# EAGLE board C64_2 (EAGLE 5.12), part 1 of 2
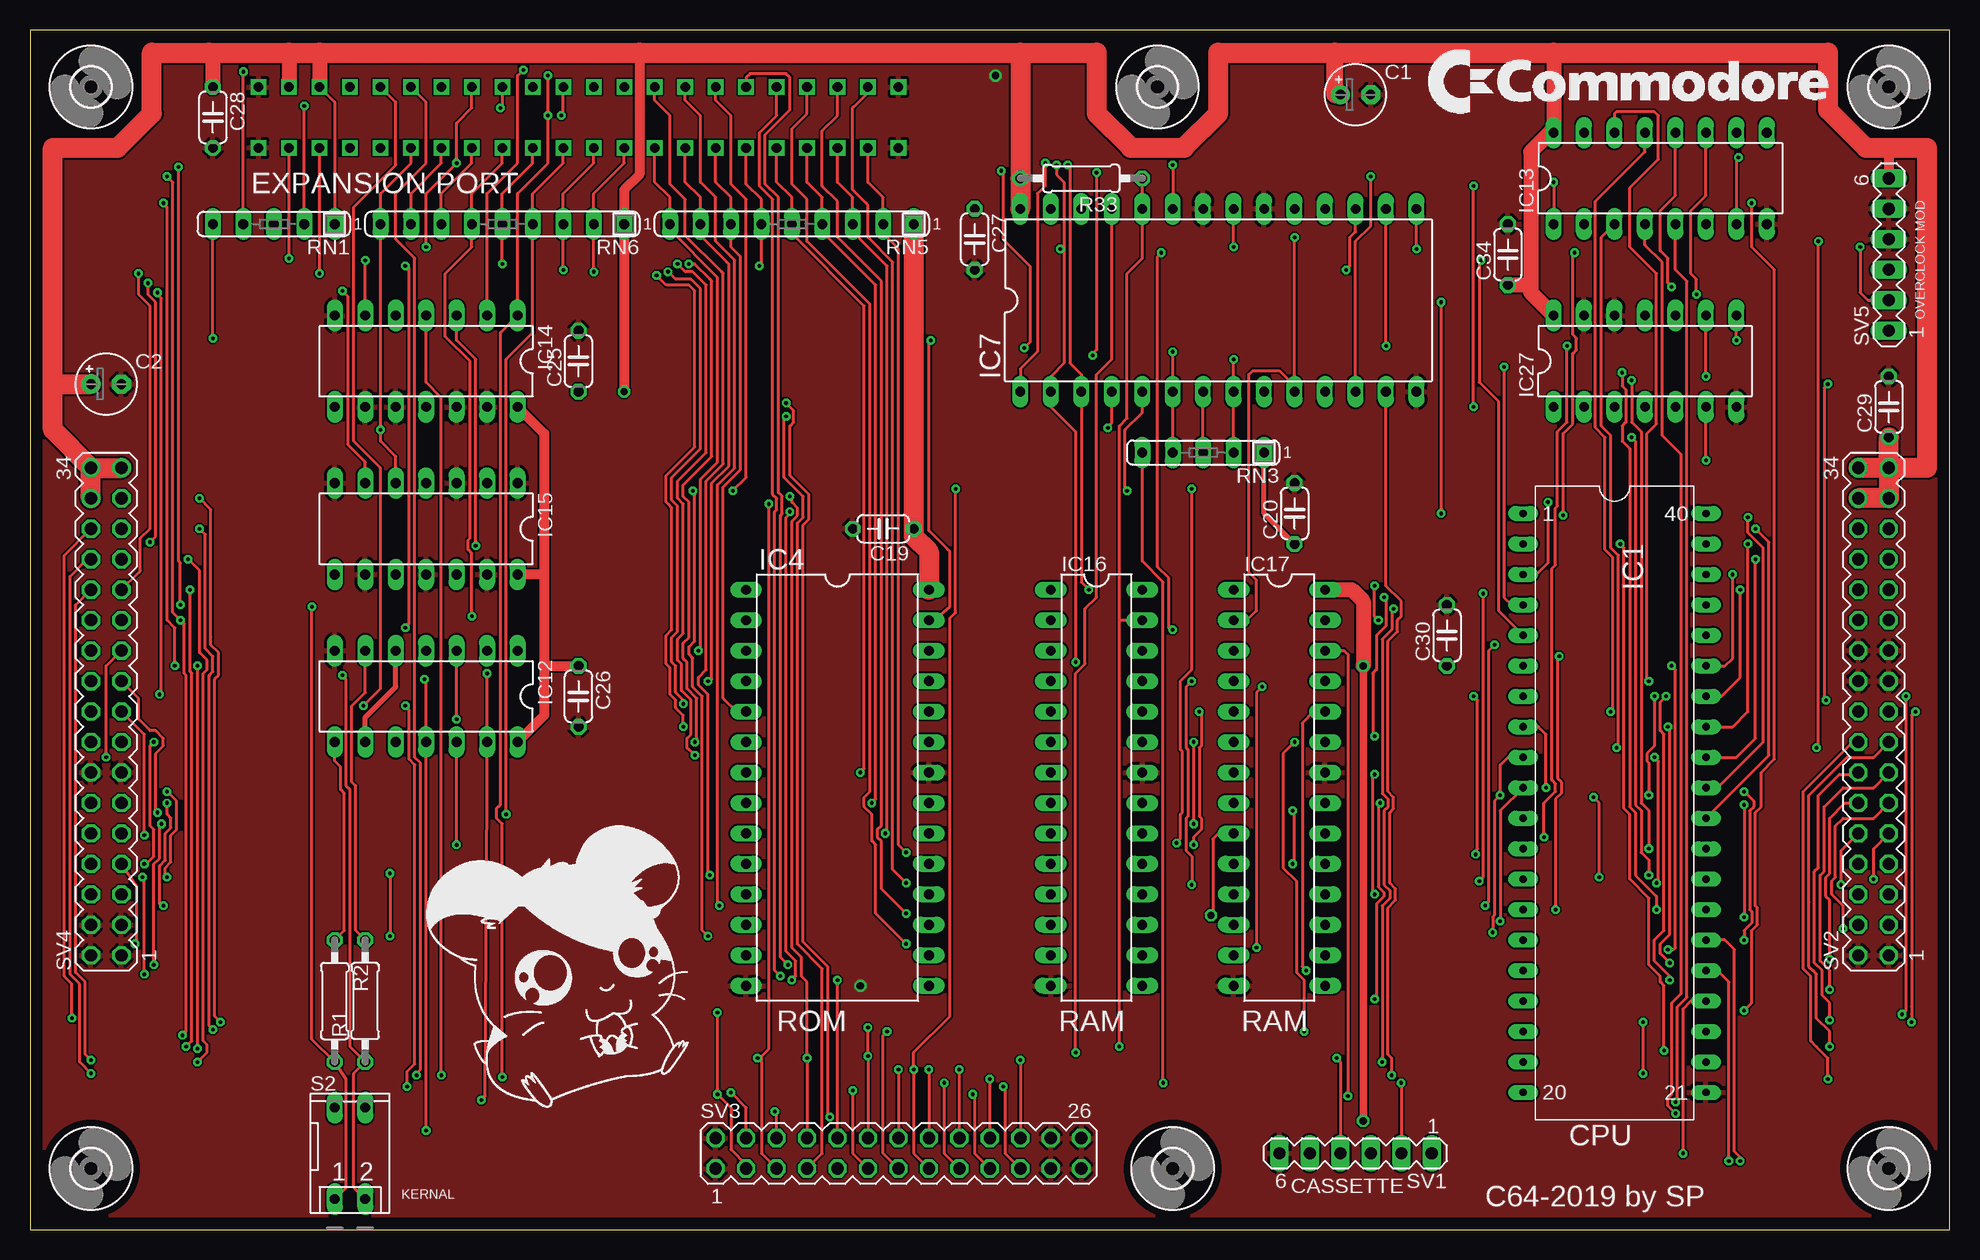
[diagram p0: board, top side]
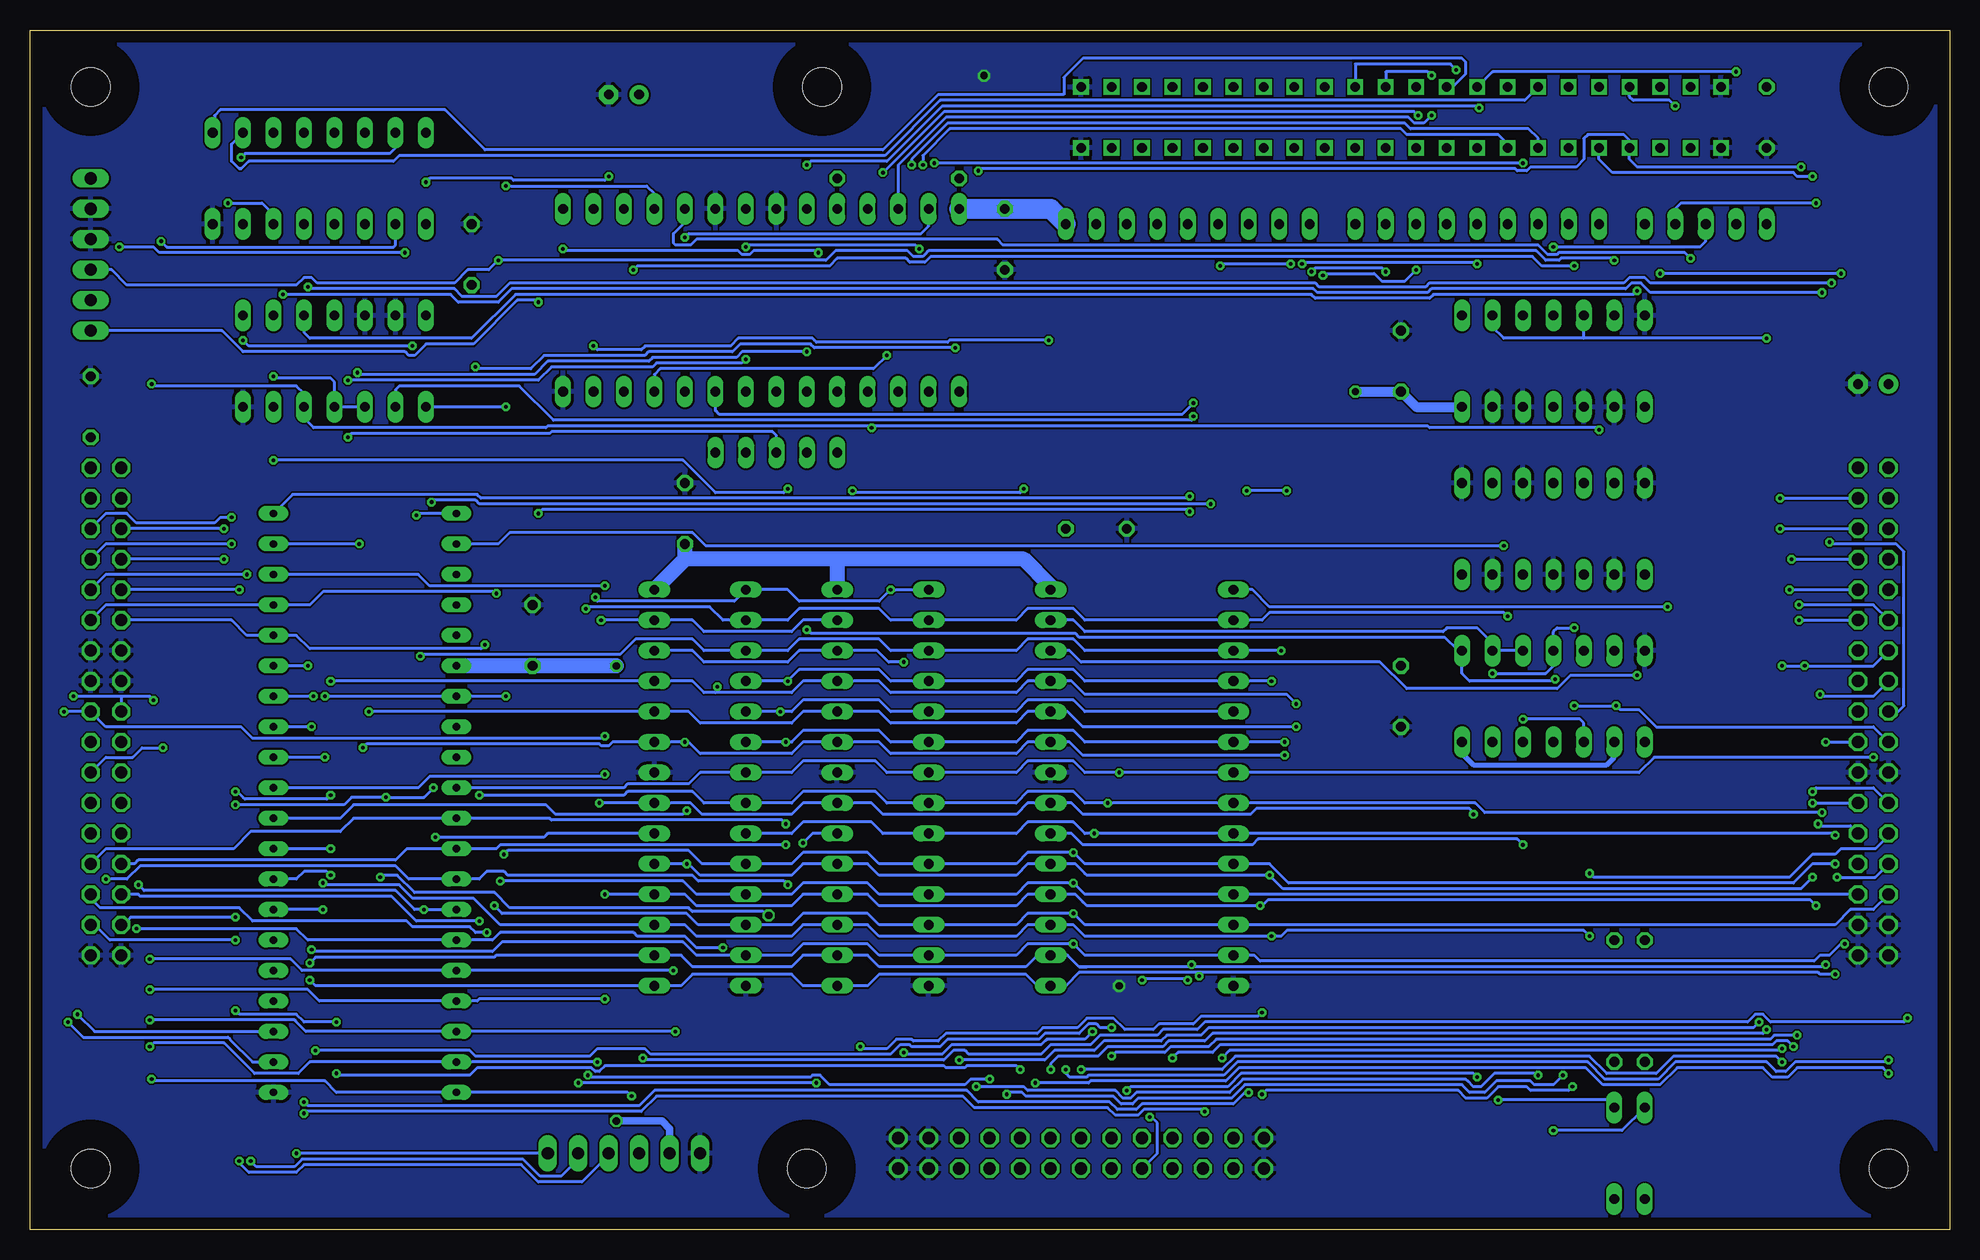
[diagram p1: board, bottom side, seen from below]

Size 160 x 100 mm. Coordinates in mm from the lower left corner, seen from the top.
Outline: 0,0 160,0 160,100 0,100 0,0
Copper layers (1*16): Top 0.035mm / dielectric 1.5mm / Bottom 0.035mm
Design rules "default *": minimum track width 10mil, minimum drill 12mil, track to track 6mil, track to pad 6mil, pad to pad 6mil, via to via 6mil, smd to smd 6mil, copper to edge 40mil, drill to drill 8mil, minimum pad ring 10mil, minimum via ring 8mil, stop-mask expansion 4mil, vias tented up to drill 0mil, thermal gap 10mil

## Footprints (pad centres in the part's own frame; a part is rotated, then mirrored left to right if it is on the bottom)
E2,5-5 = drill 0.813 pad 1.6 round: + -1.27,0 | drill 0.813 pad 1.6 octagon: - 1.27,0
C050-024X044 = drill 0.813 octagon: 1 -2.54,0; 2 2.54,0
EXPANSIONPORT = drill 0.8 square: 1 -26.67,2.54; 2 -24.13,2.54; 3 -21.59,2.54; 4 -19.05,2.54; 5 -16.51,2.54; 6 -13.97,2.54; 7 -11.43,2.54; 8 -8.89,2.54; 9 -6.35,2.54; 10 -3.81,2.54; 11 -1.27,2.54; 12 1.27,2.54; 13 3.81,2.54; 14 6.35,2.54; 15 8.89,2.54; 16 11.43,2.54; 17 13.97,2.54; 18 16.51,2.54; 19 19.05,2.54; 20 21.59,2.54; 21 24.13,2.54; 22 26.67,2.54; A -26.67,-2.54; B -24.13,-2.54; C -21.59,-2.54; D -19.05,-2.54; E -16.51,-2.54; F -13.97,-2.54; H -11.43,-2.54; J -8.89,-2.54; K -6.35,-2.54; L -3.81,-2.54; M -1.27,-2.54; N 1.27,-2.54; P 3.81,-2.54; R 6.35,-2.54; S 8.89,-2.54; T 11.43,-2.54; U 13.97,-2.54; V 16.51,-2.54; W 19.05,-2.54; X 21.59,-2.54; Y 24.13,-2.54; Z 26.67,-2.54
DIP40 = drill 0.61 pad 1.27 long: 1 -24.13,-7.62; 2 -21.59,-7.62; 3 -19.05,-7.62; 4 -16.51,-7.62; 5 -13.97,-7.62; 6 -11.43,-7.62; 7 -8.89,-7.62; 8 -6.35,-7.62; 9 -3.81,-7.62; 10 -1.27,-7.62; 11 1.27,-7.62; 12 3.81,-7.62; 13 6.35,-7.62; 14 8.89,-7.62; 15 11.43,-7.62; 16 13.97,-7.62; 17 16.51,-7.62; 18 19.05,-7.62; 19 21.59,-7.62; 20 24.13,-7.62; 21 24.13,7.62; 22 21.59,7.62; 23 19.05,7.62; 24 16.51,7.62; 25 13.97,7.62; 26 11.43,7.62; 27 8.89,7.62; 28 6.35,7.62; 29 3.81,7.62; 30 1.27,7.62; 31 -1.27,7.62; 32 -3.81,7.62; 33 -6.35,7.62; 34 -8.89,7.62; 35 -11.43,7.62; 36 -13.97,7.62; 37 -16.51,7.62; 38 -19.05,7.62; 39 -21.59,7.62; 40 -24.13,7.62
DIL28 = drill 0.813 long: 1 -16.51,-7.62; 2 -13.97,-7.62; 3 -11.43,-7.62; 4 -8.89,-7.62; 5 -6.35,-7.62; 6 -3.81,-7.62; 7 -1.27,-7.62; 8 1.27,-7.62; 9 3.81,-7.62; 10 6.35,-7.62; 11 8.89,-7.62; 12 11.43,-7.62; 13 13.97,-7.62; 14 16.51,-7.62; 15 16.51,7.62; 16 13.97,7.62; 17 11.43,7.62; 18 8.89,7.62; 19 6.35,7.62; 20 3.81,7.62; 21 1.27,7.62; 22 -1.27,7.62; 23 -3.81,7.62; 24 -6.35,7.62; 25 -8.89,7.62; 26 -11.43,7.62; 27 -13.97,7.62; 28 -16.51,7.62
DIL14 = drill 0.813 long: 1 -7.62,-3.81; 2 -5.08,-3.81; 3 -2.54,-3.81; 4 0,-3.81; 5 2.54,-3.81; 6 5.08,-3.81; 7 7.62,-3.81; 8 7.62,3.81; 9 5.08,3.81; 10 2.54,3.81; 11 0,3.81; 12 -2.54,3.81; 13 -5.08,3.81; 14 -7.62,3.81
DIL16 = drill 0.813 long: 1 -8.89,-3.81; 2 -6.35,-3.81; 3 -3.81,-3.81; 4 -1.27,-3.81; 5 1.27,-3.81; 6 3.81,-3.81; 7 6.35,-3.81; 8 8.89,-3.81; 9 8.89,3.81; 10 6.35,3.81; 11 3.81,3.81; 12 1.27,3.81; 13 -1.27,3.81; 14 -3.81,3.81; 15 -6.35,3.81; 16 -8.89,3.81
DIL28-3 = drill 0.813 long: 1 -16.51,-3.81; 2 -13.97,-3.81; 3 -11.43,-3.81; 4 -8.89,-3.81; 5 -6.35,-3.81; 6 -3.81,-3.81; 7 -1.27,-3.81; 8 1.27,-3.81; 9 3.81,-3.81; 10 6.35,-3.81; 11 8.89,-3.81; 12 11.43,-3.81; 13 13.97,-3.81; 14 16.51,-3.81; 15 16.51,3.81; 16 13.97,3.81; 17 11.43,3.81; 18 8.89,3.81; 19 6.35,3.81; 20 3.81,3.81; 21 1.27,3.81; 22 -1.27,3.81; 23 -3.81,3.81; 24 -6.35,3.81; 25 -8.89,3.81; 26 -11.43,3.81; 27 -13.97,3.81; 28 -16.51,3.81
0207/10 = drill 0.813 octagon: 1 -5.08,0; 2 5.08,0
SIL5 = drill 0.813 long: 1 -5.08,0; 2 -2.54,0; 3 0,0; 4 2.54,0; 5 5.08,0
SIL9 = drill 0.813 long: 1 -10.16,0; 2 -7.62,0; 3 -5.08,0; 4 -2.54,0; 5 0,0; 6 2.54,0; 7 5.08,0; 8 7.62,0; 9 10.16,0
DP-02 = drill 0.813 long: 1 -1.27,-3.81; 2 1.27,-3.81; 3 1.27,3.81; 4 -1.27,3.81
MA06-1 = drill 1.016 long: 1 -6.35,0; 2 -3.81,0; 3 -1.27,0; 4 1.27,0; 5 3.81,0; 6 6.35,0
MA17-2 = drill 1.016 octagon: 1 -20.32,-1.27; 2 -20.32,1.27; 3 -17.78,-1.27; 4 -17.78,1.27; 5 -15.24,-1.27; 6 -15.24,1.27; 7 -12.7,-1.27; 8 -12.7,1.27; 9 -10.16,-1.27; 10 -10.16,1.27; 11 -7.62,-1.27; 12 -7.62,1.27; 13 -5.08,-1.27; 14 -5.08,1.27; 15 -2.54,-1.27; 16 -2.54,1.27; 17 0,-1.27; 18 0,1.27; 19 2.54,-1.27; 20 2.54,1.27; 21 5.08,-1.27; 22 5.08,1.27; 23 7.62,-1.27; 24 7.62,1.27; 25 10.16,-1.27; 26 10.16,1.27; 27 12.7,-1.27; 28 12.7,1.27; 29 15.24,-1.27; 30 15.24,1.27; 31 17.78,-1.27; 32 17.78,1.27; 33 20.32,-1.27; 34 20.32,1.27
MA13-2 = drill 1.016 octagon: 1 -15.24,-1.27; 2 -15.24,1.27; 3 -12.7,-1.27; 4 -12.7,1.27; 5 -10.16,-1.27; 6 -10.16,1.27; 7 -7.62,-1.27; 8 -7.62,1.27; 9 -5.08,-1.27; 10 -5.08,1.27; 11 -2.54,-1.27; 12 -2.54,1.27; 13 0,-1.27; 14 0,1.27; 15 2.54,-1.27; 16 2.54,1.27; 17 5.08,-1.27; 18 5.08,1.27; 19 7.62,-1.27; 20 7.62,1.27; 21 10.16,-1.27; 22 10.16,1.27; 23 12.7,-1.27; 24 12.7,1.27; 25 15.24,-1.27; 26 15.24,1.27
3,2 = hole 3.2: 0,0

## Placement (x,y rotation side)
C1  10µ  [E2,5-5]  110.49,94.61 0 top
C2  10µ  [E2,5-5]  6.35,70.48 0 top
C19  100n  [C050-024X044]  71.12,58.42 180 top
C20  100n  [C050-024X044]  105.41,59.69 90 top
C25  100n  [C050-024X044]  45.72,72.39 90 top
C26  100n  [C050-024X044]  45.72,44.45 270 top
C27  100n  [C050-024X044]  78.74,82.55 270 top
C28  100n  [C050-024X044]  15.24,92.71 270 top
C29  100n  [C050-024X044]  154.94,68.58 90 top
C30  100n  [C050-024X044]  118.11,49.53 90 top
C34  100n  [C050-024X044]  123.19,81.28 90 top
CN1  EXPANSIONPORT-C64  [EXPANSIONPORT]  45.72,92.71 0 top
IC1  6510 CPU  [DIP40]  132.08,35.56 270 top
IC4  27C512  [DIL28]  67.31,36.83 270 top
IC7  27C512  [DIL28]  99.06,77.47 0 top
IC12  74HC11  [DIL14]  33.02,44.45 180 top
IC13  74HC139  [DIL16]  135.89,87.63 0 top
IC14  74HC08  [DIL14]  33.02,72.39 180 top
IC15  74HC04  [DIL14]  33.02,58.42 180 top
IC16  61256  [DIL28-3]  88.9,36.83 270 top
IC17  61256  [DIL28-3]  104.14,36.83 270 top
IC27  74HC32  [DIL14]  134.62,72.39 0 top
R1  3K3  [0207/10]  27.94,19.05 90 top
R2  3K3  [0207/10]  25.4,19.05 270 top
R33  1K5  [0207/10]  87.63,87.63 180 top
RN1  3K3  [SIL5]  20.32,83.82 180 top
RN3  3K3  [SIL5]  97.79,64.77 180 top
RN5  3K3  [SIL9]  63.5,83.82 180 top
RN6  3K3  [SIL9]  39.37,83.82 180 top
S2  KERNAL  [DP-02]  26.67,6.35 0 top
SV1  CASS  [MA06-1]  110.49,6.35 180 top
SV2  [MA17-2]  153.67,43.18 90 top
SV3  [MA13-2]  72.39,6.35 0 top
SV4  [MA17-2]  6.35,43.18 90 top
SV5  [MA06-1]  154.94,81.28 90 top
U$1  [3,2]  5.08,95.25 0 top
U$2  [3,2]  5.08,5.08 0 top
U$3  [3,2]  154.94,5.08 0 top
U$4  [3,2]  154.94,95.25 0 top
U$5  [3,2]  93.98,95.25 0 top
U$6  [3,2]  95.25,5.08 0 top

## Library data of the parts
C1 C2 C19 C20 C25-C30 C34 R1 R2 R33 = rcl
CN1 = 0RB_Commodore
IC1 = 0RB_65xx
IC4 IC7 = memory
IC12-IC15 IC27 = 74xx-us
IC16 IC17 = memory-hitachi; OC_FARNELL: unknown; OC_NEWARK: unknown
RN1 RN3 RN5 RN6 = resistor-sil; OC_FARNELL: unknown; OC_NEWARK: unknown
S2 = switch-dil; MPN: MCDP02; OC_FARNELL: 1255233; OC_NEWARK: 26M1095
SV1-SV5 = con-lstb; OC_FARNELL: unknown; OC_NEWARK: unknown
U$1-U$6 = holes

## Nets
/A15: IC15.6 IC27.10
/AEC: IC7.25 SV3.13
/BA: CN1.12 IC7.26 IC14.1 SV3.11
/BASIC: IC7.17 IC12.4 IC12.13 S2.3
/CAS: IC7.9 SV3.9
/CASRAM: IC7.18 IC27.1
/CHAREN: IC1.27 IC7.6 RN3.4
/CHAROM: IC7.15 IC12.1 IC12.11 S2.4
/CIA1: IC13.12 SV4.18
/CIA2: IC13.11 SV4.20
/CIAS: IC13.7 IC13.15
/COLOR: IC13.6 SV3.18
/CS_HIRAM: IC17.20 IC27.8
/CS_LORAM: IC16.20 IC27.6
/DMA: CN1.13 IC14.2 IC14.5 RN1.5
/EXROM: CN1.9 IC7.23 RN1.4
/GAME: CN1.8 IC7.1 RN1.3
/HIRAM: IC1.28 IC7.7 RN3.3
/IRQ: CN1.4 IC1.3 RN1.2 SV3.5 SV4.22
/KERNAL: IC4.27 IC7.16 IC12.2 IC12.3 IC12.10
/LORAM: IC1.29 IC7.8 RN3.2
/NMI: CN1.D IC1.4 SV4.24
/RAS: IC27.2 SV3.7
/RAS_CAS: IC27.3 IC27.4 IC27.9
/RESET: CN1.C IC1.40 SV3.8 SV4.25
/ROM_CS: IC4.20 IC12.12
/ROMH: CN1.B IC7.19
/ROML: CN1.11 IC7.11
/SID: IC13.5 SV3.4
/SRQ_IN: SV1.4 SV4.30
/VA14: IC7.5 SV3.15 SV4.26
/VA15: SV3.17 SV4.28
/VIC: IC13.4 SV3.6
A0: CN1.Y IC1.7 IC4.10 IC16.10 IC17.10 RN5.2 SV2.3 SV4.15
A1: CN1.X IC1.8 IC4.9 IC16.9 IC17.9 RN5.3 SV2.4 SV4.17
A2: CN1.W IC1.9 IC4.8 IC16.8 IC17.8 RN5.4 SV2.5 SV4.19
A3: CN1.V IC1.10 IC4.7 IC16.7 IC17.7 RN5.5 SV2.6 SV4.21
A4: CN1.U IC1.11 IC4.6 IC16.6 IC17.6 RN5.6 SV2.7
A5: CN1.T IC1.12 IC4.5 IC16.5 IC17.5 RN5.7 SV2.8
A6: CN1.S IC1.13 IC4.4 IC16.4 IC17.4 RN5.8 SV2.9
A7: CN1.R IC1.14 IC4.3 IC16.3 IC17.3 RN5.9 SV2.10
A8: CN1.P IC1.15 IC4.25 IC13.14 IC16.25 IC17.25 RN6.2 SV2.11
A9: CN1.N IC1.16 IC4.24 IC13.13 IC16.24 IC17.24 RN6.3 SV2.12
A10: CN1.M IC1.17 IC4.21 IC13.2 IC16.21 IC17.21 RN6.4 SV2.13
A11: CN1.L IC1.18 IC4.23 IC13.3 IC16.23 IC17.23 RN6.5 SV2.14
A12: CN1.K IC1.19 IC4.2 IC7.10 IC7.27 IC16.2 IC17.2 RN6.6 SV2.15
A13: CN1.J IC1.20 IC7.2 IC7.21 IC16.26 IC17.26 RN6.7 SV2.16
A14: CN1.H IC1.22 IC7.3 IC16.1 IC17.1 RN6.8 SV2.17
A15: CN1.F IC1.23 IC7.4 IC15.5 IC27.5 RN6.9 SV2.18
AEC: IC14.4 SV3.21
CAEC: IC1.5 IC14.6 SV5.3
CASS_MOTOR: IC1.24 SV1.1
CASS_SENSE: IC1.25 RN3.5 SV1.2
CASS_WRT: IC1.26 SV1.3
CPHI0: IC1.1 SV5.2
D0: CN1.21 IC1.37 IC4.11 IC16.11 IC17.11 SV2.23 SV4.5
D1: CN1.20 IC1.36 IC4.12 IC16.12 IC17.12 SV2.24 SV4.6
D2: CN1.19 IC1.35 IC4.13 IC16.13 IC17.13 SV2.25 SV4.7
D3: CN1.18 IC1.34 IC4.15 IC16.15 IC17.15 SV2.26 SV4.8
D4: CN1.17 IC1.33 IC4.16 IC16.16 IC17.16 SV2.27 SV4.9
D5: CN1.16 IC1.32 IC4.17 IC16.17 IC17.17 SV2.28 SV4.10
D6: CN1.15 IC1.31 IC4.18 IC16.18 IC17.18 SV2.29 SV4.11
D7: CN1.14 IC1.30 IC4.19 IC16.19 IC17.19 SV2.30 SV4.12
DOTCLK: CN1.6 SV3.19
GND: C1.- C2.- C19.2 C20.2 C25.2 C26.2 C27.2 C28.2 C29.2 C30.2 C34.2 CN1.1 CN1.22 CN1.A CN1.Z IC1.21 IC4.14 IC4.22 IC7.14 IC7.20 IC7.22 IC12.7 IC13.8 IC14.7 IC14.9 IC14.10 IC14.12 IC14.13 IC15.1 IC15.3 IC15.7 IC15.9 IC15.11 IC15.13 IC16.14 IC16.22 IC17.14 IC17.22 IC27.7 IC27.12 IC27.13 SV1.6 SV2.1 SV2.2 SV2.19 SV2.20 SV2.21 SV2.22 SV3.1 SV3.2 SV3.23 SV3.24 SV3.25 SV3.26 SV4.1 SV4.2 SV4.3 SV4.4 SV4.13 SV4.14 SV5.4 SV5.5
GR/W: IC7.13 SV3.20
I/O: IC7.12 IC13.1
I/O1: CN1.7 IC13.10
I/O2: CN1.10 IC13.9
N$16: IC4.1 R2.2 S2.1
N$17: IC12.8 R2.1
N$23: IC12.6 R1.2
PHI0: SV3.10 SV5.1
PHI2: CN1.E IC1.39 SV3.12 SV4.23
POTX: SV3.14 SV4.27
POTY: SV3.16 SV4.29
R/W: CN1.5 IC1.38 IC7.24 IC16.27 IC17.27 R33.1 SV3.3 SV4.16
RDY: IC1.2 IC14.3
ROM_A13: IC4.26 R1.1 S2.2
ROW4: SV3.22 SV4.31
VCC: C1.+ C2.+ C19.1 C20.1 C25.1 C26.1 C27.1 C28.1 C29.1 C30.1 C34.1 CN1.2 CN1.3 IC1.6 IC4.28 IC7.28 IC12.5 IC12.9 IC12.14 IC13.16 IC14.14 IC15.14 IC16.28 IC17.28 IC27.14 R33.2 RN1.1 RN3.1 RN5.1 RN6.1 SV1.5 SV2.31 SV2.32 SV2.33 SV2.34 SV4.32 SV4.33 SV4.34 SV5.6